# Altium PCB PCB2.PcbDoc
Units mm, origin at the board's own origin, x right, y up, seen from the top; angles counter-clockwise.
Board outline 44.5 x 29.5 mm, 2 copper layers (Top Layer, Bottom Layer); 32 components, 25 nets, 144 pads, 17 vias.
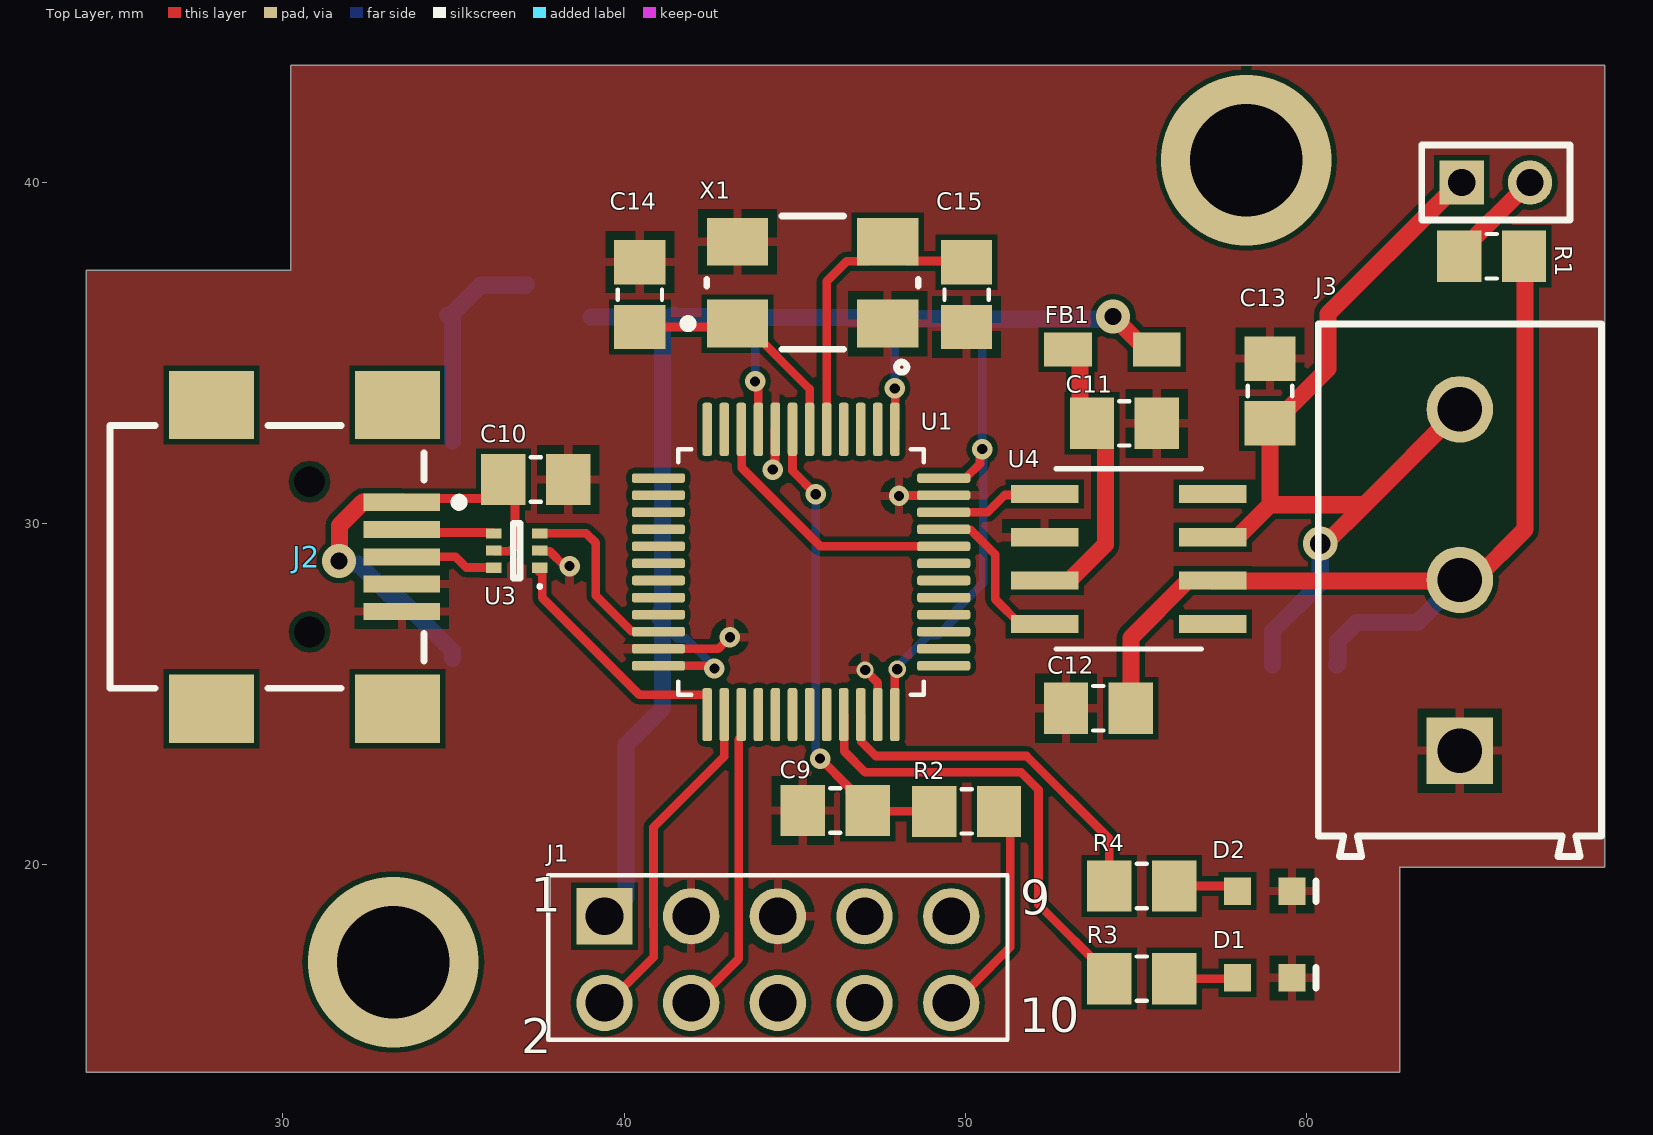
[diagram p0: Top Layer view]
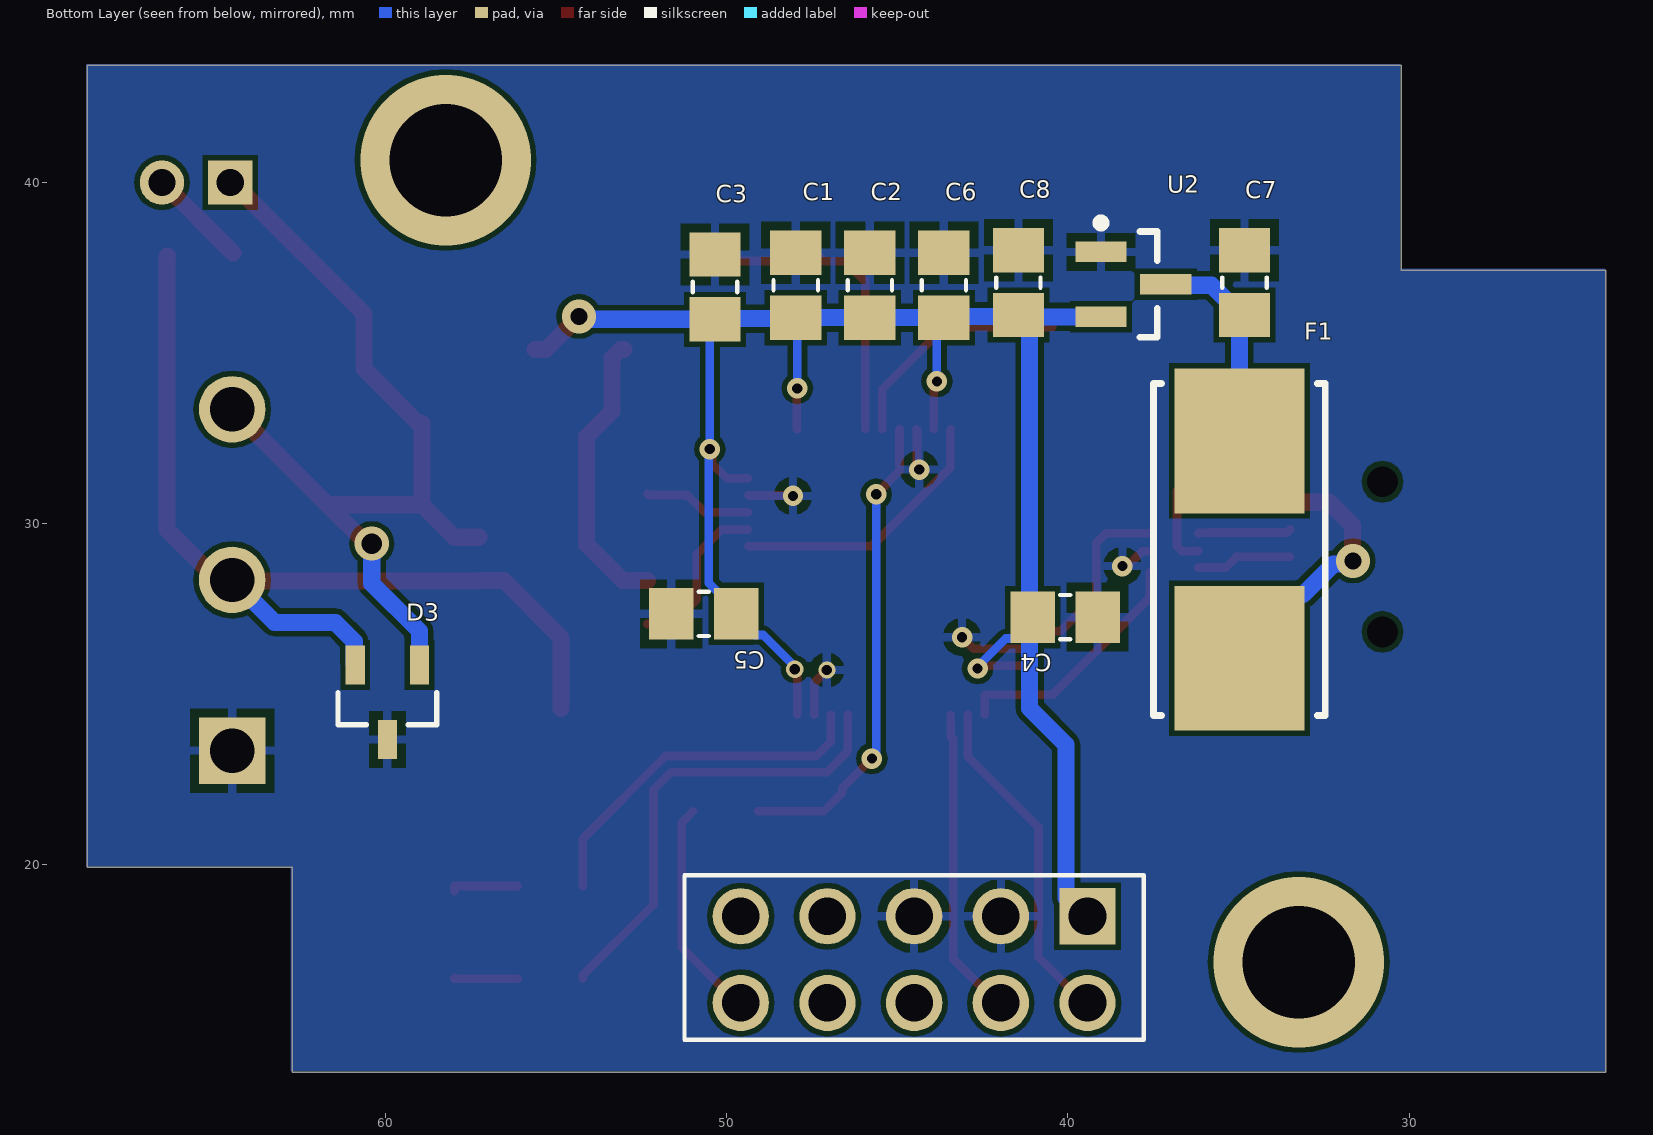
[diagram p1: Bottom Layer view, seen from below]
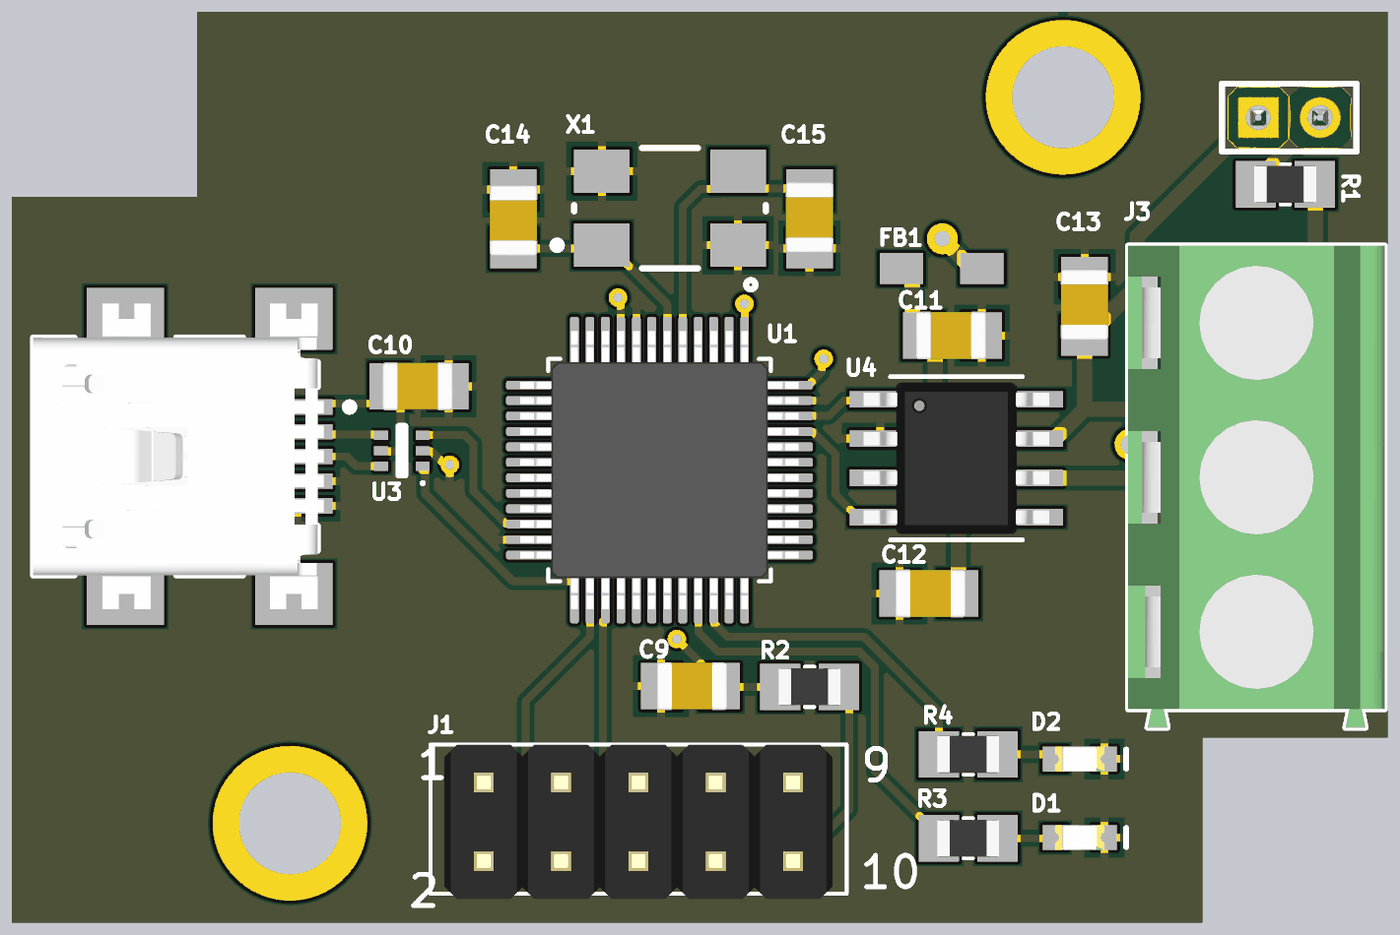
[diagram p2: 3D render of the assembled board from above, using the file's embedded part models]
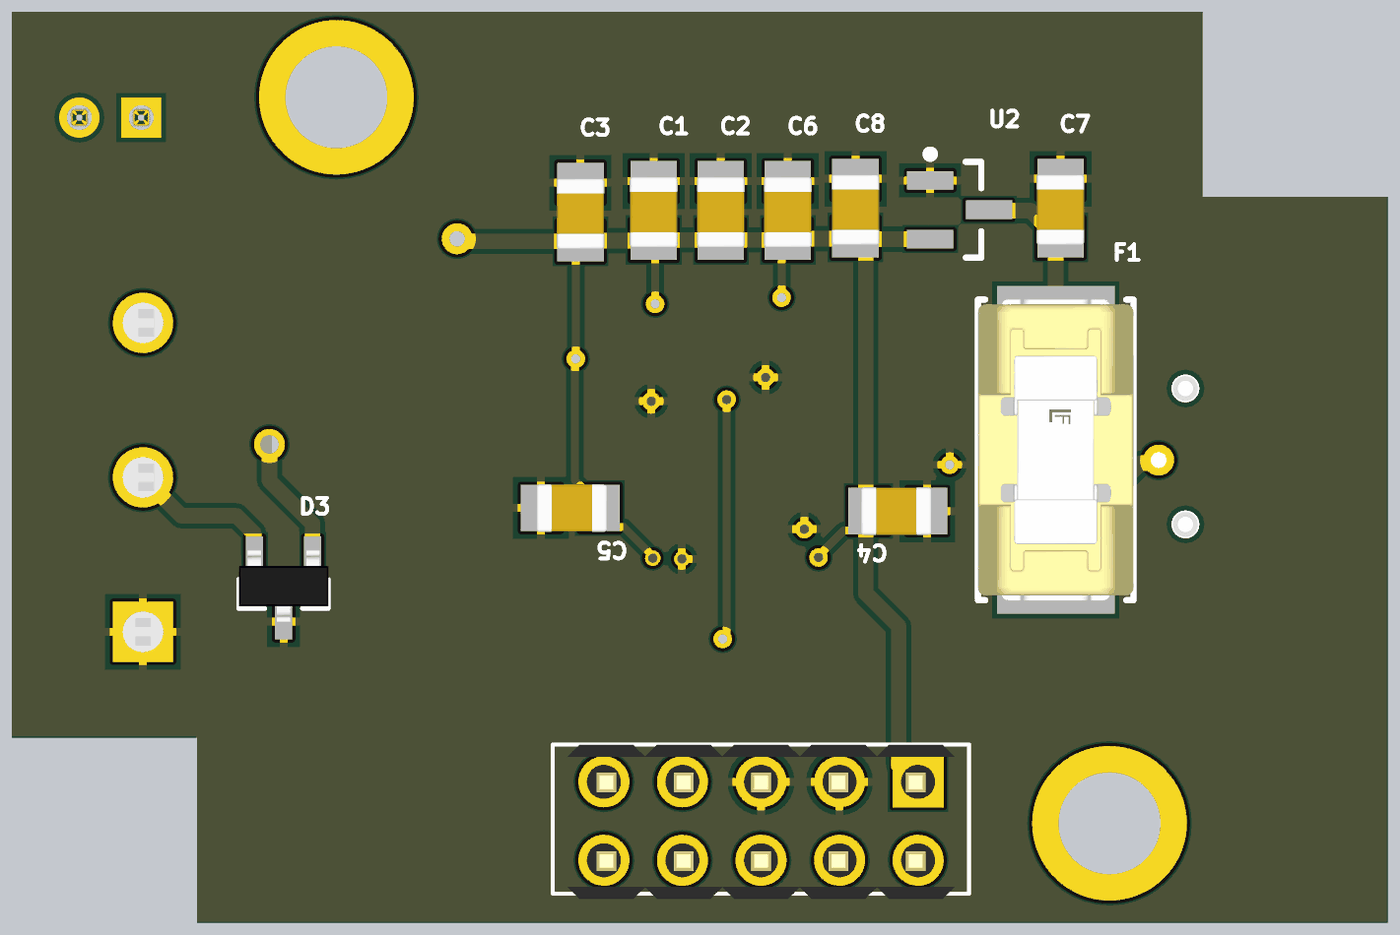
[diagram p3: 3D render of the assembled board from below, using the file's embedded part models]

## Layer stack, top to bottom
Top Solder: solder mask 0.0102, Solder Resist, Dk 3.5
Top Layer: signal copper 0.0356
Dielectric 1: dielectric 0.32, FR-4, Dk 4.8
Bottom Layer: signal copper 0.0356
Bottom Solder: solder mask 0.0102, Solder Resist, Dk 3.5

## Board outline
24.237,13.923 24.237,37.423 30.237,37.423 30.237,43.423 68.737,43.423 68.737,19.923 62.737,19.923 62.737,13.923

## Design rules (kind name [scope] priority, off if disabled: settings)
Clearance [All] p1: gap=0.152 ignorepadtopadclearanceinfootprint=FALSE
ComponentClearance [All] p1: gap=0.152 collisioncheckmode=3 verticalgap=2540 showdistances=FALSE
PolygonConnect [All] p1: connectstyle=Relief reliefconductorwidth=0.254 reliefentries=4 polygonreliefangle="90 Angle" airgapwidth=0.254
RoutingVias [All] p1: holewidth=0.3 width=0.8 viastyle="Through Hole" minholewidth=0.3 minwidth=0.5 maxholewidth=5 maxwidth=5
SolderMaskExpansion [All] p1: expansion=0.102 istentingtop=FALSE
Width [All] p1: maxlimit=1 minlimit=0.254 preferedwidth=0.5
29 further rules are at their usual default settings.

## Components (designator, comment, footprint, x,y, rotation, side; value= is the part's Value field where it differs from the comment)
C1 "Cap Semi" CAP0805 47.976,36.982 r270 bottom value=100nF
C2 "Cap Semi" CAP0805 45.807,36.982 r270 bottom value=1uF
C3 "Cap Semi" CAP0805 50.343,36.932 r270 bottom value=100nF
C4 "Cap Semi" CAP0805 40.081,27.254 r0 bottom value=100nF
C5 "Cap Semi" CAP0805 50.673,27.356 r180 bottom value=100nF
C6 "Cap Semi" CAP0805 43.637,36.982 r270 bottom value=4.7uF
C7 "Cap Semi" CAP0805 34.823,37.059 r270 bottom value=1uF
C8 "Cap Semi" CAP0805 41.453,37.059 r270 bottom value=1uF
C9 "Cap Semi" CAP0805 46.189,21.59 r0 top value=100nF
C10 "Cap Semi" CAP0805 37.414,31.293 r180 top value=100nF
C11 "Cap Semi" CAP0805 54.661,32.938 r180 top value=100nF
C12 "Cap Semi" CAP0805 53.899,24.587 r0 top value=22pF
C13 "Cap Semi" CAP0805 58.928,33.884 r90 top value=22pF
C14 "Cap Semi" CAP0805 40.462,36.71 r270 top value=30pF
C15 "Cap Semi" CAP0805 50.038,36.71 r90 top value=30pF
D1 "STATUS" 0603_A 58.776,16.688 r180 top
D2 "CAN1" 0603_A 58.776,19.228 r180 top
D3 "SM24CANB-02HTG" SOT-23-3 59.944,24.765 r0 bottom
F1 "500mA" FP-0154-MFG 34.976,29.235 r270 bottom
FB1 "150R @100 MHz" MURA-BLM21-H1-CHIP-2_V 54.31,35.103 r180 top
J1 "JTAG/SWD" 61301021021 44.506,21.221 r180 top
J2 "10033526-N3212LF" FCI-10033526-N3212LF_V 30.701,29.023 r270 top
J3 "CAN" 3PIN-Screw-Terminal 64.491,28.346 r90 top
R1 "1200hmJunper" 120ohmJumper 65.421,37.832 r0 top
R2 "Res3" RES0805 50.038,21.565 r0 top value=10K
R3 "Res3" RES0805 55.169,16.662 r0 top value=820R
R4 "Res3" RES0805 55.169,19.38 r0 top value=330R
U1 "STM32F103C8T6" STM32F103C8T6 45.187,28.581 r270 top
U2 "MCP1700T-3302E/TT" SOT-23-TT3_N 38.085,37.008 r180 bottom
U3 "NUF2042XV6T1" ONSC-SOT-563-6-463A-01_V 36.855,29.207 r180 top
U4 "SN65HVD232Q" SO-8_S 54.788,28.963 r0 top
X1 "ABMM2-8.000MHZ-E2-T" ABRA-ABMM2-4_V 45.523,37.059 r0 top

## Footprints (in the part's own frame and the unit in brackets; to place one, negate y for a bottom-side part, rotate by r counter-clockwise, add the part's x,y. Pads: shape width x height; smd on the part's side, far side on the other; paste and mask are expansions set on the pad)
3PIN-Screw-Terminal [mm] "5,00mm - modular - green - Horizontal entry with rising cage clamp -  10,0mm height - 03p"
  rect 1.95x1.95 hole 1.3: 1(-5,0)
  round 1.95 hole 1.3: 2(0,0) 3(5,0)
  silkscreen extent -8.1,-4.15 7.5,4.15, body extent -8.1,-4.15 7.5,4.15, height 10.05
120ohmJumper [mm]
  rect 1.3x1.3 hole 0.8 paste-1000 mask+0: 1(-0.873,2.159)
  rect 1.3x1.5 smd: 2(0.95,0) 4(-0.95,0)
  round 1.3 hole 0.8 paste-1000 mask+0: 3(1.127,2.159)
  silkscreen extent -2.05,-0.65 2.3,3.26, body extent -2.15,-0.6 2.4,3.36, height 0.65
0603_A [mm] "Chip LED, 2-Leads, Body 1.6x0.8mm, IPC Medium Density"
  rect 0.8x0.8 smd: 1(-0.8,0) 2(0.8,0)
  silkscreen extent -1.5,-0.3 -1.5,0.3, body extent -0.8,-0.4 0.8,0.4, height 0.7
61301021021 [mm] "Pin Header, pitch 2.54 mm, THT, Angled, dual row, 10p"
  rect 1.65x1.65 hole 1.1: 1(5.08,2.73)
  round 1.65 hole 1.1: 2(5.08,5.27) 3(2.54,2.73) 4(2.54,5.27) 5(0,2.73) 6(0,5.27) 7(-2.54,2.73) 8(-2.54,5.27) 9(-5.08,2.73) 10(-5.08,5.27)
  silkscreen extent -6.73,1.52 6.73,6.35, body extent -6.27,1.52 6.27,6.52, height 10.01
ABRA-ABMM2-4_V [mm] "SMD, 4-Leads, Body 6.2x3.9mm, Pitch 4.4mm, Height 1.2mm"
  rect 1.8x1.4 smd: 1(-2.2,-1.2) 2(2.2,-1.2) 3(2.2,1.2) 4(-2.2,1.2)
  silkscreen extent -3.77,-1.95 3.1,1.95, body extent -3.1,-1.95 3.1,1.95, height 1.2
CAP0805 [mm]
  rect 1.3x1.5 smd: 1(-0.95,0) 2(0.95,0)
  silkscreen extent -0.15,-0.65 0.15,0.65, body extent -1.1,-0.78 1.2,0.77, height 0.96
FCI-10033526-N3212LF_V [mm] "SMD, 5-Leads, Body 9.2x7.7mm, Pitch 0.8mm"
  rect 0.5x2.25 smd: 1(-1.6,2.788) 2(-0.8,2.788) 3(0,2.788) 4(0.8,2.788) 5(1.6,2.788)
  rect 2x2.5 smd: 6(-4.45,2.663) 7(4.45,2.663) 8(-4.45,-2.787) 9(4.45,-2.787)
  round 0 hole 0.9 unplated: MH1(-2.2,0.083) MH2(2.2,0.083)
  silkscreen extent -3.85,-5.77 3.85,4.59, body extent -4.95,-5.77 4.95,3.63, height 4.02
FP-0154-MFG [mm]
  rect 4.24x3.81 smd paste+0 mask+0: 1(-3.185,0) 2(3.185,0)
  silkscreen extent -4.86,-2.51 4.86,2.51, body extent -4.86,-2.51 4.86,2.51, height 3.81
MURA-BLM21-H1-CHIP-2_V [mm] "Chip Ferrite Bead, 2-Leads, Body 2x1.25mm, Height 1.05mm"
  rect 1.4x1 smd: 1(-1.3,0) 2(1.3,0)
  body extent -1,-0.63 1,0.63, height 1.05
ONSC-SOT-563-6-463A-01_V [mm] "SOT23, 6-Leads, Body 1.6x1.2mm, Pitch 0.5mm"
  rect 0.45x0.3 smd: 1(-0.675,0.5) 2(-0.675,0) 3(-0.675,-0.5) 4(0.675,-0.5) 5(0.675,0) 6(0.675,0.5)
  silkscreen extent -0.72,-0.8 0.1,1.1, body extent -0.6,-0.8 0.6,0.8, height 0.6
RES0805 [mm]
  rect 1.3x1.5 smd: 1(-0.95,0) 2(0.95,0)
  silkscreen extent -0.15,-0.65 0.15,0.65, body extent -1,-0.6 1,0.6, height 0.65
SO-8_S [mil]
  rect 78x21 smd: 1(-97,75) 2(-97,25) 3(-97,-25) 4(-97,-75) 5(97,-75) 6(97,-25) 7(97,25) 8(97,75)
  silkscreen extent -84,-104 84,104, body extent -118,-96 118,96, height 67
SOT-23-3 [mil]
  rect 22x45 smd: 1(-37,-43) 2(37,-43) 3(0,43)
  silkscreen extent -57,-11 57,26, body extent -57,-48 57,43, height 38
SOT-23-TT3_N [mm] "SOT23, 3-Leads, Body 2.9x1.3mm, Pitch 0.95mm, Lead Span 2.4mm, IPC Medium Density"
  rect 1.5x0.6 smd: 1(-0.95,0.95) 2(-0.95,-0.95) 3(0.95,0)
  silkscreen extent -1.07,-1.55 0.7,1.92, body extent -0.7,-1.52 0.7,1.53, height 1.12
STM32F103C8T6 [mm]
  rrect50% 1.56x0.28 smd: 1(-4.18,2.75) 2(-4.18,2.25) 3(-4.18,1.75) 4(-4.18,1.25) 5(-4.18,0.75) 6(-4.18,0.25) 7(-4.18,-0.25) 8(-4.18,-0.75) 9(-4.18,-1.25) 10(-4.18,-1.75) 11(-4.18,-2.25) 12(-4.18,-2.75) 25(4.18,-2.75) 26(4.18,-2.25) 27(4.18,-1.75) 28(4.18,-1.25) 29(4.18,-0.75) 30(4.18,-0.25) 31(4.18,0.25) 32(4.18,0.75) 33(4.18,1.25) 34(4.18,1.75) 35(4.18,2.25) 36(4.18,2.75)
  rrect50% 0.28x1.56 smd: 13(-2.75,-4.18) 14(-2.25,-4.18) 15(-1.75,-4.18) 16(-1.25,-4.18) 17(-0.75,-4.18) 18(-0.25,-4.18) 19(0.25,-4.18) 20(0.75,-4.18) 21(1.25,-4.18) 22(1.75,-4.18) 23(2.25,-4.18) 24(2.75,-4.18) 37(2.75,4.18) 38(2.25,4.18) 39(1.75,4.18) 40(1.25,4.18) 41(0.75,4.18) 42(0.25,4.18) 43(-0.25,4.18) 44(-0.75,4.18) 45(-1.25,4.18) 46(-1.75,4.18) 47(-2.25,4.18) 48(-2.75,4.18)
  silkscreen extent -6.15,-3.6 3.6,3.6, body extent -4.5,-4.5 4.5,4.5, height 1.46

## Part data
C1 C2 C3 C4 C5 C6 C7 C8 C9 C10 C11 C12 C13 C14 C15: "Capacitor (Semiconductor SIM Model)", LatestRevisionDate=29-May-2009, LatestRevisionNote="IPC-7351 Footprint Added.", PackageDescription="Chip Capacitor", PackageReference=C1206, Published=8-Jun-2000, Publisher="Altium Limited"
D1: library part CMP-1426-00001-1, "SMD mono-color Chip LED, WL-SMCW, Red", Color=Red, Manufacturer="Wuerth Elektronik", PartNumber=150060RS75000, ComponentLink1Description="Manufacturer URL", ComponentLink1URL=http://www.we-online.com, ComponentLink2Description=Datasheet, ComponentLink2URL=http://katalog.we-online.com/led/datasheet/150060RS75000.pdf, PackageReference=0603_A
D2: library part CMP-1426-00002-1, "SMD mono-color Chip LED, WL-SMCW, Green", Color=Green, Manufacturer="Wuerth Elektronik", PartNumber=150060GS75000, ComponentLink1Description="Manufacturer URL", ComponentLink1URL=http://www.we-online.com, ComponentLink2Description=Datasheet, ComponentLink2URL=http://katalog.we-online.com/led/datasheet/150060GS75000.pdf, PackageReference=0603_A
F1: library part CMP-08605-000021-1, "FUSE BOARD MNT 500MA 125VAC/VDC", Fuse Current=0.5A, Manufacturer=Littelfuse, Manufacturer Part Number=0154.500DRT, Max Fuse Ac Voltage=125V, Package=0154, Temperature="-55°C to +125°C", Temperature Range High=+125°C, Temperature Range Low=-55°C, Automotive=No, Category=Fuse, ComponentLink2Description=Datasheet, ComponentLink2URL=https://www.littelfuse.com/~/media/electronics/datasheets/fuses/littelfuse_fuse_154_154t_154l_154tl_datasheet.pdf.pdf, Device Class L1="Circuit Protection", Device Class L2=Fuses, Device Class L3=unset, Digikey Description="FUSE BOARD MNT 500MA 125VAC/VDC", Fuse Blow Speed=Slow, Fuse I2T=0.24A2Sec, Height=3.81mm, Lead Free=Yes, Max Fuse Dc Voltage=125V, Mouser Description="Surface Mount Fuses Fuseblck w/ fuse .5A OMNI BLOK 154T", Octopart=https://octopart.com/0154.500drt-littelfuse-565915, RoHS=TRUE
FB1: library part CMP-0686-00717-2, "Chip Ferrite Bead for General Signal lines, 150 Ohm, 800 mA, -55 to 125 degC, 2 x 1.25 x 1.05 mm SMD, Tape and Reel", DC Resistance="0.1 Ohm Max.", Manufacturer=Murata, Operating Temperature Range="-55 to 125 degC", PartNumber=BLM21AG151SN1D, Rated Current="800 mA", ComponentLink1Description="Manufacturer URL", ComponentLink1URL=http://www.murata.com/, ComponentLink2Description=Datasheet, ComponentLink2URL=http://www.murata.com/products/catalog/pdf/c31e.pdf, ComponentLink3Description="Package Specification", ComponentLink3URL=http://www.murata.com/products/catalog/pdf/c31e.pdf, DatasheetVersion=08/2013, Mounting Technology="Surface Mount", PackageDescription="2-Pin Chip, Body 2 x 1.25 mm", PackageReference=BLM21_H1050-2, Packing="Tape and Reel", Impedance (at 100 MHz)="150 Ohm +/- 25%"
J2: library part CMP-1698-00001-3, "Mini USB B-Type, 5-Pin SMD, RoHS, Tape and Reel", Package Quantity=1, ComponentLink1Description="Manufacturer URL", ComponentLink1URL=http://portal.fciconnect.com/, ComponentLink2Description=Datasheet, ComponentLink2URL=http://portal.fciconnect.com/Comergent//fci/drawing/10033526.pdf, DatasheetVersion="Rev. N", Height="4 mm", Length="9.9 mm", Mount="Surface Mount", Mounting Technology="Surface Mount", PackageDescription="5-Pin Surface Mount Device, Body 9.2 x 7.7 mm, Pitch 0.8 mm", Packaging="Tape and Reel", PartNumber=10033526-N3212LF, Pins=5, RoHSCompliant=True
J3: library part 3PIN-Screw-Terminal
R2 R3 R4: "Resistor", LatestRevisionDate=29-May-2009, LatestRevisionNote="IPC-7351 Footprint Added.", PackageDescription="Chip Resistor", PackageReference=J1-0603, Published=8-Jun-2000, Publisher="Altium Limited"
U1: "ARMÂ® CortexÂ®-M3 STM32F1 Microcontroller IC 32-Bit 72MHz 64KB _64K x 8_ FLASH", Package="LQFP-48 STMicroelectronics", Availability=Unavailable, MF=STMicroelectronics, MP=STM32F103C8T6, Price=None, SnapEDA_Link=https://www.snapeda.com/parts/STM32F103C8T6/STMicroelectronics/view-part/52195/?ref=snap
U2: library part CMP-0136-00791-1, "Low Quiescent Current LDO, 3-Pin SOT-23, Extended Temperature, Tape and Reel", Code_IPC=SOT23-3, DatasheetVersion="revB, Feb-2007", PackageDescription="3-Lead Plastic Small Outline Transistor (TT) [SOT-23]", PackageReference=SOT-23-TT3, PackageVersion="revBB, Aug-2009"
U3: library part CMP-1066-00026-1, "USB Upstream Terminator with ESD Protection, 6-Pin SOT-563, Pb-Free, Tape and Reel", Manufacturer="On Semiconductor", C Typ (pF)=42, ComponentLink1Description="Manufacturer URL", ComponentLink1URL=http://www.onsemi.com/, ComponentLink2Description=Datasheet, ComponentLink2URL=http://www.onsemi.cn/pub_link/Collateral/NUF2030XV6-D.PDF, ComponentLink3Description="Package Specification", ComponentLink3URL=http://www.onsemi.cn/pub_link/Collateral/463A-01.PDF, DatasheetVersion="Rev. 2", Mounting Technology="Surface Mount", Number of Lines=3, PackageDescription="6-Pin Small Outline Transistor, Body 1.6 x 1.2 mm, Pitch 0.5 mm", PackageReference=SOT-563-6-463A-01, PackageVersion="Rev. F, 04/2005", Packing="Tape and Reel", PartNumber=NUF2042XV6T1, RoHS=Pb-Free, V(BR) Typ (V)=6.8, VRWM Max (V)=5.25
X1: library part CMP-0277-00003-1, "Ceramic Surface Mount Low Profile Quartz Crystal, 8 MHz, -20 to 70 degC, 4-Pin 6 x 3.6 x 1.2 mm SMD, RoHS, 1000pcs / Reel", Frequency="8 MHz", Load Capacitance CL="18 pF Typ.", Manufacturer=Abracon, Shunt Capacitance C0="7 pF Max.", Temperature Range="-20 to 70 degC", ComponentLink1Description="Manufacturer URL", ComponentLink1URL=http://www.abracon.com/, ComponentLink2Description=Datasheet, ComponentLink2URL=http://www.abracon.com/Resonators/ABMM2.pdf, ComponentLink3Description="Package Specification", ComponentLink3URL=http://www.abracon.com/Resonators/ABMM2.pdf, DatasheetVersion=Jan-13, Esr="72 Ohm Max.", Mounting Technology="Surface Mount", PackageDescription="4-Pin SMD, Body 6 x 3.6 mm, Pitch 4.4 mm", Packing="1000pcs / Reel", PartNumber=ABMM2-8.000MHZ-E2-T, RoHS=TRUE

## Via types
v1: diameter 0.6, hole 0.3, Top Layer to Bottom Layer, 10 vias
v2: diameter 0.5, hole 0.3, Top Layer to Bottom Layer, 2 vias
v3: diameter 1, hole 0.5, Top Layer to Bottom Layer, 2 vias
v4: diameter 5, hole 3.3, Top Layer to Bottom Layer, 2 vias
v5: diameter 1, hole 0.6, Top Layer to Bottom Layer, 1 vias

## Nets (pads, with @x,y where several pads share a name; then routed paths per layer and width w, separated by ;. In a path a pad name is that pad's centre, name@x,y a point inside that pad or via, vN(x,y) a via of type N, cw(c..) or ccw(c..) an arc to the next point about the centre after c; other vN are vias at no path point)
BOOT0: U1.10 U1.44 | length 8
  Top Layer w0.254: U1.10 43.45,32.748 43.45,31.633 45.751,29.331 U1.44
CAN1_RX: U1.45 U4.4 | length 4.9
  Top Layer w0.254: U1.45 49.38,29.818 50.154,29.818 50.876,29.095 50.876,27.782 51.6,27.058 U4.4
CAN1_STATUS_LED: R4.1 U1.34 | length 10.6
  Top Layer w0.254: U1.34 46.95,24.388 46.95,23.614 47.373,23.19 51.791,23.19 54.219,20.762 R4.1
CAN1_TX: U1.46 U4.1 | length 3.2
  Top Layer w0.254: U1.46 50.651,30.331 51.156,30.836 52.291,30.836 U4.1
GND: C1.1 C2.1 C3.1 C4.1 C5.1 C6.1 C7.1 C8.1 C9.1 C10.1 C11.1 C12.1 C13.2 C14.1 C15.1 D1.1 D2.1 D3.3 J1.3 J1.5 J2.4 J2.5 J3.1 U1.8 U1.23 U1.35 U1.47 U2.1 U3.2 U4.2 X1.2 X1.4 | length 7.3
  Top Layer w0.254: U3.2 37.553,29.184 37.824,29.184 38.254,28.753 v1(38.405,28.753) ; U1.23 42.765,26.331 v1(43.104,26.67) ; v1(44.357,31.581) 44.357,31.675 44.424,31.741 44.424,32.748 U1.8 ; v2(47.066,25.705) 47.437,25.334 U1.35 ; v1(48.057,30.81) 48.067,30.821 49.356,30.821 U1.47
NetC9_2: C9.2 R2.1 U1.7 | length 14
  Top Layer w0.254: U1.7 44.937,31.543 v1(45.618,30.861) ; v1(45.745,23.114) 46.616,22.244 46.616,22.113 47.164,21.565 R2.1
  Bottom Layer w0.254: v1(45.618,30.861) 45.618,23.241 v1(45.745,23.114)
NetC11_2: C11.2 FB1.2 U4.3 | length 8.4
  Top Layer w0.5: U4.3 53.048,28.328 54.102,29.382 54.102,32.547 53.365,33.283 53.365,34.188 53.361,34.193 53.361,34.853 53.111,35.103 FB1.2
NetC12_2: C12.2 D3.2 J3.2 R1.2 U4.6 | length 28
  Top Layer w0.5: C12.2 54.849,26.649 56.528,28.328 U4.6 57.259,28.321 64.465,28.321 J3.2 64.922,28.346 66.396,29.82 66.396,37.832 R1.2
  Bottom Layer w0.5: D3.2 60.913,25.887 60.913,26.547 61.468,27.102 63.246,27.102 J3.2
NetC13_1: C13.1 D3.1 J3.3 R1.1 U4.7 | length 26.6
  Top Layer w0.254: 58.928,30.551 58.985,30.494
  Top Layer w0.5: U4.7 57.975,29.598 58.928,30.551 ; v5(60.401,29.413) 60.557,29.413 61.695,30.551 ; J3.3 61.695,30.551 ; R1.1 64.148,39.591 64.077,39.591 60.63,36.144 60.63,34.535 59.028,32.934 C13.1 58.928,30.551 ; 58.928,30.551 61.695,30.551
  Bottom Layer w0.5: D3.1 59.004,26.848 60.401,28.245 v5(60.401,29.413)
NetD1_2: D1.2 R3.2 | length 1.9
  Top Layer w0.254: R3.2 57.976,16.662 D1.2
NetD2_2: D2.2 R4.2 | length 2
  Top Layer w0.254: R4.2 57.976,19.38 D2.2
NetJ2_2: J2.2 U3.4 | length 2.7
  Top Layer w0.254: J2.2 33.576,29.736 35.95,29.736 35.956,29.73 36.157,29.73 U3.4
NetJ2_3: J2.3 U3.6 | length 2.8
  Top Layer w0.254: J2.3 35.063,29.023 35.377,28.709 36.178,28.709 U3.6
NetR1_3: R1.3 R1.4 | length 3
  Top Layer w0.254: R1.4 R1.4@64.471,37.932 ; R1.3@66.53,39.991 R1.3
  Top Layer w0.5: R1.4@64.471,37.932 R1.3@66.53,39.991
NRST: J1.10 R2.2 | length 5.7
  Top Layer w0.254: 50.216,16.485 51.32,17.589 51.32,21.232 R2.2
OSC_IN: C15.2 U1.5 X1.3 | length 9.2
  Top Layer w0.254: U1.5 45.937,37.097 46.525,37.686 47.15,37.686 X1.3 48.288,37.694 50.005,37.694 C15.2
OSC_OUT: C14.2 U1.6 X1.1 | length 7
  Top Layer w0.254: C14.2 43.225,35.76 X1.1 43.523,35.859 45.437,33.945 U1.6
STATUS_LED: R3.1 U1.33 | length 13.6
  Top Layer w0.254: U1.33 46.45,24.388 46.45,23.324 47.066,22.708 51.64,22.708 52.146,22.202 52.146,18.835 54.219,16.762 R3.1
SWCLK: J1.4 U1.27 | length 8.3
  Top Layer w0.254: 42.596,16.485 43.358,17.247 43.358,23.682 43.437,23.761 U1.27
SWDIO: J1.2 U1.26 | length 9.1
  Top Layer w0.254: 40.056,16.485 40.869,17.297 40.869,18.183 40.862,18.19 40.862,21.101 42.937,23.175 U1.26
USB_D+: U1.25 U3.1 | length 7.4
  Top Layer w0.254: U3.1@37.505,28.583 37.58,28.583 37.603,28.56 37.603,27.827 40.446,24.984 42.424,24.984 42.437,24.971 U1.25
USB_D-: U1.22 U3.3 | length 5.6
  Top Layer w0.254: U3.3 37.542,29.718 38.887,29.718 39.17,29.435 39.17,27.893 40.219,26.844 40.994,26.844 U1.22
V_BUS: C10.2 F1.2 J2.1 U3.5 | length 13.8
  Top Layer w0.254: J2.1 33.599,30.734 35.941,30.734 36.464,31.257 C10.2 36.805,30.952 36.805,29.338 36.656,29.189 36.198,29.189 U3.5
  Top Layer w0.5: v3(31.648,28.905) 31.668,28.924 31.668,29.947 32.344,30.623 J2.1
  Bottom Layer w0.5: v3(31.648,28.905) 31.744,28.81 32.217,28.81 33.106,27.92 33.321,27.92 34.976,26.265 F1.2
V_USB: C7.2 F1.1 U2.3 | length 6.4
  Bottom Layer w0.5: F1.1 34.976,35.957 C7.2 34.923,36.109 35.796,36.982 37.109,36.982 U2.3
VCC: C1.2 C2.2 C3.2 C4.2 C5.2 C6.2 C8.2 FB1.1 J1.1 U1.1 U1.9 U1.24 U1.36 U1.48 U2.2 | length 60
  Top Layer w0.254: U1.24 42.568,25.831 v1(42.647,25.752) ; v1(43.84,34.163) 43.84,34.069 43.937,33.973 U1.9 ; v1(47.93,33.96) 47.946,33.944 47.946,32.77 U1.1 ; U1.36 47.937,25.585 v2@48.006,25.654 ; U1.48 50.007,31.331 50.429,31.753 50.429,32.116 v1(50.495,32.182)
  Top Layer w0.5: v3(54.331,36.068) 55.296,35.103 FB1.1
  Bottom Layer w0.254: C4.2@41.031,27.154 41.554,26.631 41.822,26.631 42.647,25.806 v1(42.647,25.752) ; C8.2@41.401,36.058 C8.2 ; C6.2 43.84,35.829 v1(43.84,34.163) ; v2@47.93,25.73 47.939,25.73 48.053,25.844 48.053,25.853 48.932,26.733 49.2,26.733 49.723,27.256 49.723,27.456 50.521,28.253 50.521,32.156 v1(50.495,32.182) 50.495,35.829 C3.2 ; v1(47.93,33.96) 47.93,35.986 C1.2@47.955,36.011
  Bottom Layer w0.5: U2.2 C8.2@41.401,36.058 ; J1.1@40.056,19.025 40.056,23.52 41.123,24.587 41.123,27.163 C4.2 41.031,27.354 41.123,27.446 41.123,35.779 C8.2 41.491,36.071 43.599,36.071 C6.2 43.84,36.032 C2.2 47.934,36.032 C1.2@47.955,36.011 ; C1.2 48.002,36.007 50.317,36.007 C3.2 50.348,35.987 54.402,35.987 v3@54.407,35.992
  other v2: 48.006,25.73
pads on no net: J1.6 J1.7 J1.8 J1.9 J2.6 J2.7 J2.8 J2.9 J2.MH1 J2.MH2 U1.2 U1.3 U1.4 U1.11 U1.12 U1.13 U1.14 U1.15 U1.16 U1.17 U1.18 U1.19 U1.20 U1.21 U1.28 U1.29 U1.30 U1.31 U1.32 U1.37 U1.38 U1.39 U1.40 U1.41 U1.42 U1.43 U4.5 U4.8
copper on no net:
  other v4: 33.237,17.148 58.237,40.648

## Polygon pours and split planes (outlines as drawn)
GND on Top Layer "Top Layer-No Net" (solid, remove dead copper, pour order 0): 24.237,13.923 24.237,37.423 30.237,37.423 30.237,43.423 68.737,43.423 68.737,19.923 62.737,19.923 62.737,13.923
GND on Bottom Layer "Top Layer-No Net1" (solid, pour order 1): 24.27,13.962 24.27,37.462 30.27,37.462 30.27,43.462 68.77,43.462 68.77,19.962 62.77,19.962 62.77,13.962

## Silkscreen, mask and mechanical layers (free items; w line width, h text height)
Mechanical 4:
  lines w0.127: 24.232,37.414 30.251,37.414 30.251,43.434 ; 24.237,37.423 24.237,13.923 62.737,13.923 62.737,19.923 68.737,19.923 68.737,43.423 30.237,43.423 ; 61.612,13.948 cw(c61.612,13.923) 61.637,13.923

## Text inside footprints (layer, text, board x,y; h text height)
J1: Top Overlay "10" at 51.587,15.088 h1.02; Top Overlay "9" at 51.613,18.542 h1.02; Top Overlay "1" at 37.262,18.618 h1.02; Top Overlay "2" at 36.982,14.478 h1.02